# Altium PCB LED.PcbDoc
Units mm, origin at the board's own origin, x right, y up, seen from the top; angles counter-clockwise.
Board outline 20.32 x 27.94 mm, 2 copper layers (Top Layer, Bottom Layer), stack 1.671 mm thick; 3 components, 2 nets, 6 pads, 1 vias.
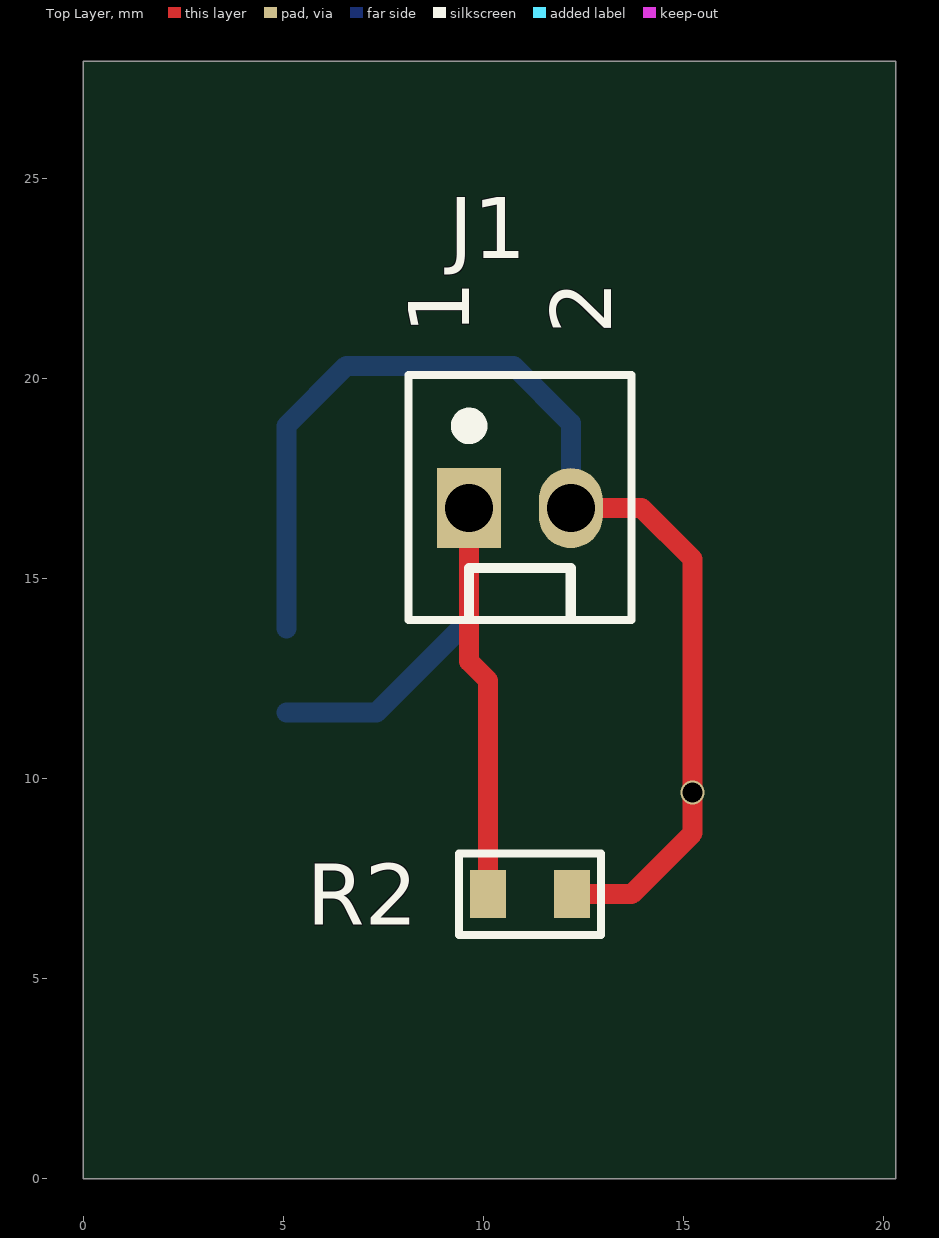
[diagram p0: Top Layer view]
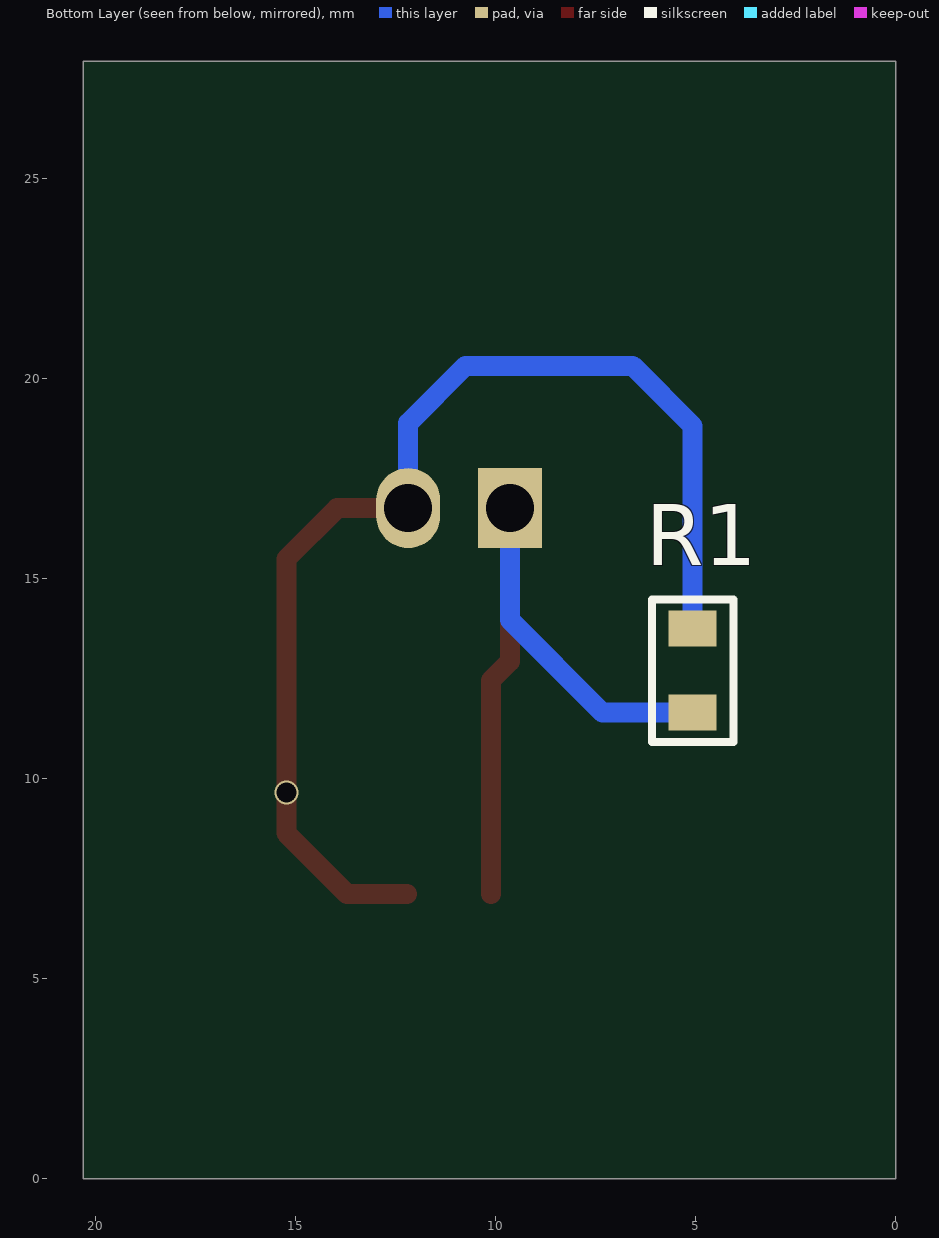
[diagram p1: Bottom Layer view, seen from below]

## Layer stack, top to bottom
Top Solder: solder mask 0.0102, Solder Resist, Dk 3.5
Top Layer: signal copper 0.0356
Dielectric 1: dielectric 1.6, FR-4, Dk 4.8
Bottom Layer: signal copper 0.0356
Bottom Solder: solder mask 0.0102, Solder Resist, Dk 3.5

## Board outline
0,0 20.32,0 20.32,27.94 0,27.94

## Design rules (kind name [scope] priority, off if disabled: settings)
Clearance [All] p1: gap=0.3 ignorepadtopadclearanceinfootprint=FALSE
PolygonConnect [All] p1: connectstyle=Relief reliefconductorwidth=0.254 reliefentries=4 polygonreliefangle="90 Angle" airgapwidth=0.254
RoutingVias [All] p1: holewidth=0.3 width=0.6 viastyle="Through Hole" minholewidth=0.3 minwidth=0.6 maxholewidth=0.3 maxwidth=0.6
SilkToSolderMaskClearance [IsPad] p1: minsilkscreentomaskgap=0.1 clearancetoexposedcopper=TRUE
SolderMaskExpansion [All] p1: expansion=0.102 istentingtop=FALSE
Width [All] p1: maxlimit=1 minlimit=0.3 preferedwidth=0.5
29 further rules are at their usual default settings.

## Components (designator, comment, footprint, x,y, rotation, side; value= is the part's Value field where it differs from the comment)
J1 "1x2 Pin" DIP1x2 10.922,16.788 r90 top
R1 "" R0805 5.08,12.7 r90 bottom (schematic designator R2)
R2 "" R0805 11.176,7.112 r0 top (schematic designator R1)

## Footprints (in the part's own frame and the unit in brackets; to place one, negate y for a bottom-side part, rotate by r counter-clockwise, add the part's x,y. Pads: shape width x height; smd on the part's side, far side on the other; paste and mask are expansions set on the pad)
DIP1x2 [mm]
  rect 2x1.6 hole 1.2: 1(-0.024,1.27)
  oval 2x1.6 hole 1.2: 2(-0.024,-1.27)
  silkscreen extent -2.82,-2.79 3.3,2.79, body extent -2.9,-2.54 2.9,2.54, height 11.71
R0805 [mm]
  rect 0.9x1.2 smd: 1(-1.05,0) 2(1.05,0)
  silkscreen extent -1.78,-1.02 1.78,1.02, body extent -1.04,-0.62 0.96,0.63, height 0.61

## Part data
J1: library part SWR201-NRTN-S02-SA-WH, "Wafer: , Tin Overall, Straight w/ Type 1 Kinked End Pins, 1x2 Pos (2 pins)", Manufacturer=Sullins, Supplier Part Number 1=S9463-ND, Category=Connectors, ComponentLink1Description=https://datasheet.ciiva.com/740/swr201-nrtn-sxx-sa-wh-740670.pdf?src-supplier=Digi-Key, ComponentLink1URL=https://datasheet.ciiva.com/740/swr201-nrtn-sxx-sa-wh-740670.pdf?src-supplier=Digi-Key, ComponentLink2Description=https://datasheet.ciiva.com/16492/swr201-nrtn-sa-wh-16492311.pdf?src-supplier=Future+Electronics, ComponentLink2URL=https://datasheet.ciiva.com/16492/swr201-nrtn-sa-wh-16492311.pdf?src-supplier=Future+Electronics, Manufacturer Part Number=SWR201-NRTN-S02-SA-WH, Pricing 1="1=0.11000, 10=0.08500, 100=0.06260, 500=0.05184, 1000=0.04536, 5000=0.03888, 10000=0.03780 (USD)", RoHS=Yes, Stock 1=156546, Supplier 1=Digi-Key
R1 R2: library part RGC0402DTC360K, "Res Thkflm 0402 360K Ohm 0.5% 1/16W 50PPM/ C SMD", Case/Package=0402, Manufacturer="Stackpole Electronics", Max Operating Temperature=150°C, Min Operating Temperature=-55°C, Power Rating=63mW, Resistance=360000R, Supplier Part Number 1=RGC0402DTC360KCT-ND, Tolerance=0.5%, Category="Chip SMD Resistors", ComponentLink1Description=https://www.seielect.com/catalog/sei-rgc.pdf?src-supplier=Digi-Key, ComponentLink1URL=https://www.seielect.com/catalog/sei-rgc.pdf?src-supplier=Digi-Key, Lead Free="Lead Free", Manufacturer Part Number=RGC0402DTC360K, Mount="Surface Mount", Packaging="Tape and Reel", Pricing 1="1=0.13000, 10=0.12100, 100=0.04640, 1000=0.02039, 2500=0.01761, 5000=0.01576 (USD)", RoHS=Yes, Stock 1=3216, Supplier 1=Digi-Key

## Via types
v1: diameter 0.6, hole 0.5, Top Layer to Bottom Layer, 1 vias

## Nets (pads, with @x,y where several pads share a name; then routed paths per layer and width w, separated by ;. In a path a pad name is that pad's centre, name@x,y a point inside that pad or via, vN(x,y) a via of type N, cw(c..) or ccw(c..) an arc to the next point about the centre after c; other vN are vias at no path point)
+3V3: J1.1 R1.1 R2.1 | length 18.2
  Top Layer w0.5: J1.1 9.652,12.929 10.126,12.455 R2.1
  Bottom Layer w0.5: R1.1 7.332,11.65 9.652,13.97 J1.1
GND: J1.2 R1.2 R2.2 | length 29.6
  Top Layer w0.5: J1.2 13.966,16.764 15.24,15.49 v1(15.24,9.652) 15.24,8.636 13.716,7.112 R2.2
  Bottom Layer w0.5: R1.2 5.08,18.82 6.58,20.32 10.76,20.32 12.192,18.888 J1.2

## Text inside footprints (layer, text, board x,y; h text height)
J1: Top Overlay "2" at 13.208,21.106 h1.52 r90; Top Overlay "1" at 9.652,21.106 h1.52 r90